# Altium PCB Artemis_Plus.PcbDoc (part 2 of 2)
Units mm, origin at the board's own origin, x right, y up, seen from the top; angles counter-clockwise.
Board outline 15.5 x 10.5 mm, 4 copper layers (L1(Top), L2, L3, L4(Bot)), stack 0.828 mm thick; 85 components, 68 nets, 213 pads, 150 vias.
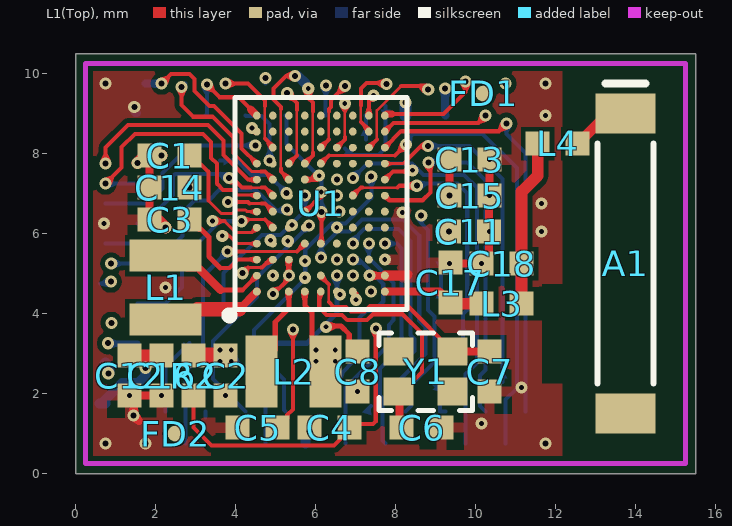
[diagram p0: L1(Top) view]

## Via types
v1: diameter 0.303/0.303/0.303/0.303 (per signal layer), hole 0.15, L1(Top) to L4(Bot), tented both sides, 71 vias
v2: diameter 0.303, hole 0.12, L1(Top) to L2, tented both sides, 44 vias
v3: diameter 0.303/0.303 (per signal layer), hole 0.12, L3 to L4(Bot), tented both sides, 21 vias
v4: diameter 0.303, hole 0.12, L3 to L4(Bot), tented both sides, 8 vias
v5: diameter 0.303/0.303 (per signal layer), hole 0.12, L1(Top) to L2, tented both sides, 3 vias
v6: diameter 0.303, hole 0.15, L1(Top) to L4(Bot), tented both sides, 3 vias

## Nets (pads, with @x,y where several pads share a name; then routed paths per layer and width w, separated by ;. In a path a pad name is that pad's centre, name@x,y a point inside that pad or via, vN(x,y) a via of type N, cw(c..) or ccw(c..) an arc to the next point about the centre after c; other vN are vias at no path point) (continued)
pads on no net: A1.NC FD1.1 FD2.1 U1.B11 U1.B12 U1.C10 U1.C11 U1.C12 U1.D10 U1.D11 U1.D12 U1.E11 U1.E12 U1.F4 U1.F9 U1.F11 U1.F12 U1.G5 U1.G6 U1.G9 U1.G10 U1.G11 U1.G12 U1.H3 U1.H5 U1.H6 U1.H7 U1.H9 U1.J5 U1.J6 Y1.2 Y1.4

## Polygon pours and split planes (outlines as drawn)
GND on L2 "Polygon_1_Net_GND" (solid, remove dead copper, pour order 4): 0.199,10.301 0.199,0.199 11.801,0.199 11.801,10.301
NetC2_1 on L2 "Polygon_1_Net_VDDBH" (solid, remove dead copper, pour order 0): 3.435,3.265 6.665,3.265 6.665,2.635 3.435,2.635
GND on L4(Bot) "Polygon_2_Net_GND" (solid, remove dead copper, pour order 2): 0.199,10.301 0.199,0.199 12.101,0.199 12.101,10.301
VDD on L3 "Polygon_1_Net_VDD" (solid, remove dead copper, pour order 1): 0.199,10.301 0.199,0.199 11.801,0.199 11.801,10.301
GND on L1(Top) "Polygon_3_Net_GND" (solid, remove dead copper, pour order 3): 12.16,10.25 12.16,0.25 0.25,0.25 0.25,10.25

## Keep-outs
Keep-Out Layer:
  lines w0.127: 0.25,0.25 0.25,10.25 15.25,10.25 15.25,0.25 0.25,0.25

## Other copper
L1(Top):
  pour cut-out: 11.65,4.75 12.35,4.75 12.35,2.25 11.65,2.25 11.65,4.75
L2:
  pour cut-out: 11.65,4.75 12.35,4.75 12.35,2.25 11.65,2.25 11.65,4.75
L3:
  pour cut-out: 11.65,4.75 12.35,4.75 12.35,2.25 11.65,2.25 11.65,4.75
L4(Bot):
  pour cut-out: 11.65,4.75 12.35,4.75 12.35,2.25 11.65,2.25 11.65,4.75

## Silkscreen, mask and mechanical layers (free items; w line width, h text height)
Top Paste:
  lines w0.5: 0.65,1.05 0.65,0.65 1.45,0.65 ; 0.65,9.05 0.65,9.85 1.65,9.85 ; 11.05,0.65 12.05,0.65 ; 11.35,9.85 12.05,9.85 12.05,9.05
Top Solder:
  circle w0.254: c2.5,1 r0.091
  lines w0.5: 0.65,1.05 0.65,0.65 1.445,0.65 ; 0.65,9.05 0.65,9.85 1.65,9.85 ; 11.05,0.65 12.05,0.65 ; 11.35,9.85 12.05,9.85 12.05,9.05
Dimension:
  the board outline again, w0.127
Route Tool Path:
  lines w0.5: 12.05,2.65 12.05,4.4
RF_Shield2:
  lines w0.2: 1,0.4 11,0.4
  lines w0.5: 0.4,0.8 0.4,0.4 1.2,0.4 ; 0.4,8.8 0.4,9.6 1.4,9.6 ; 10.8,0.4 11.8,0.4 ; 11.1,9.6 11.8,9.6 11.8,8.8